# EAGLE board Side_Short (EAGLE 9.4.2)
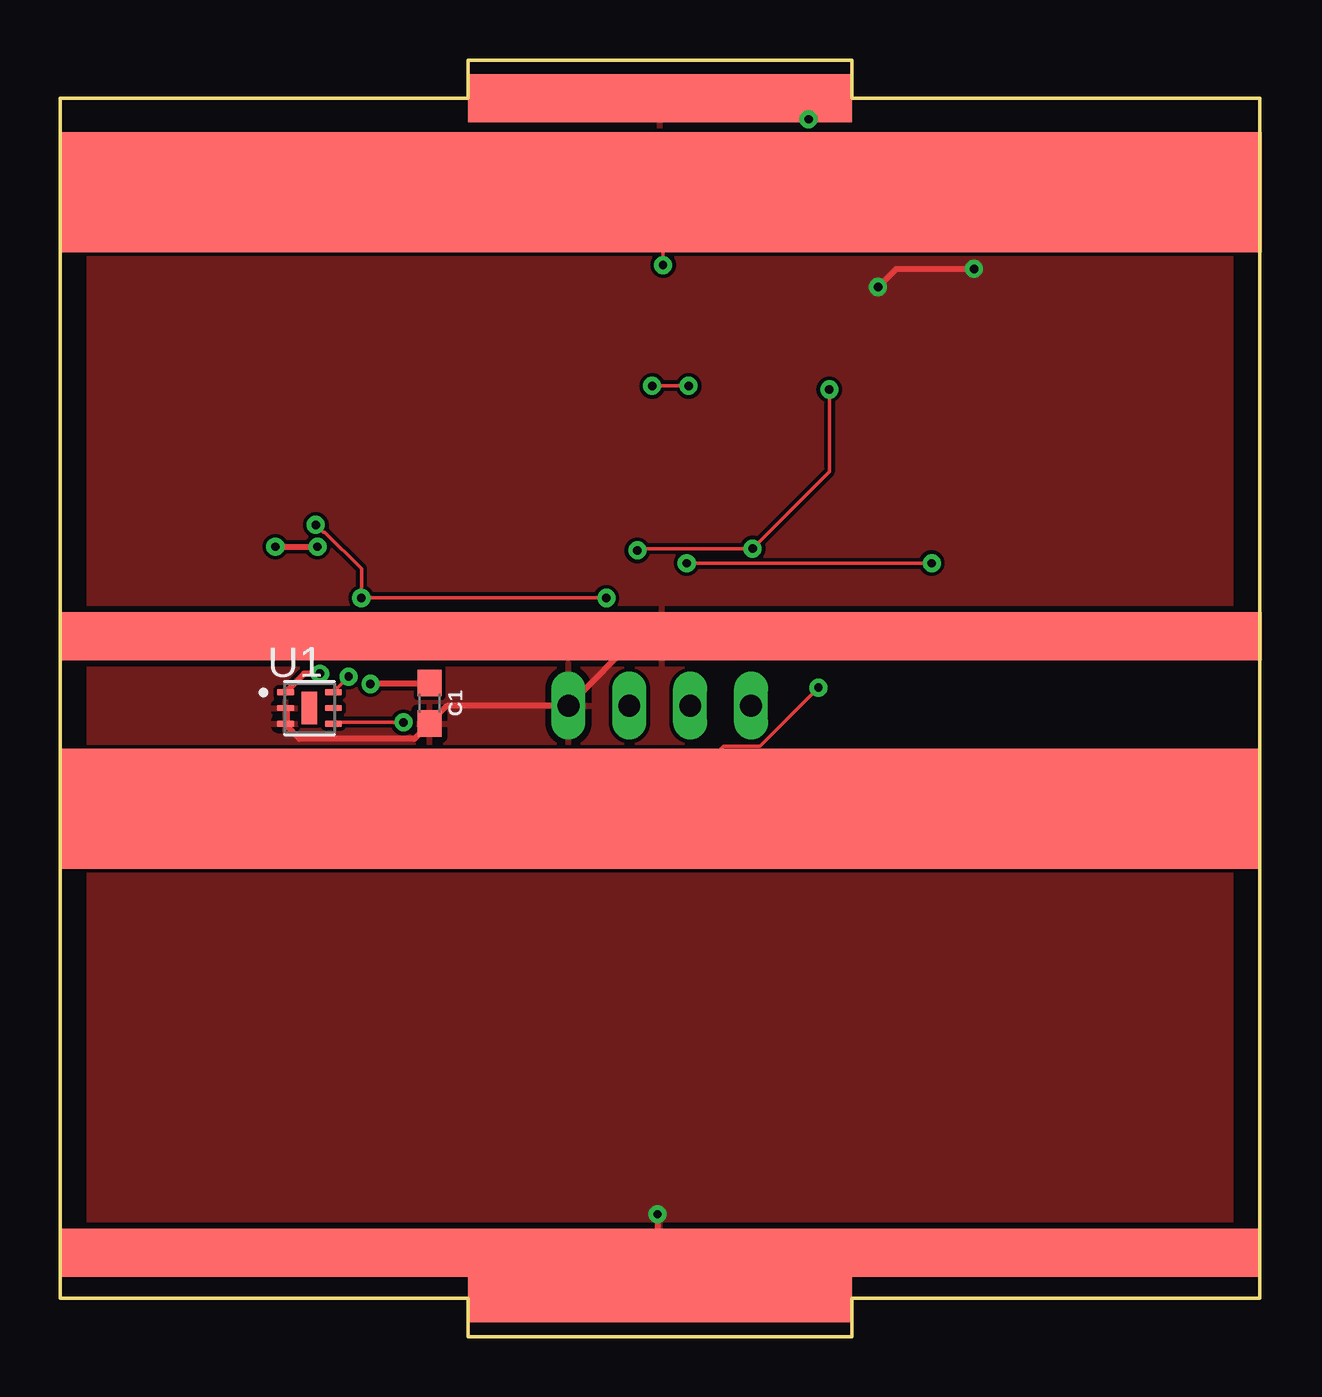
[diagram p0: board, top side]
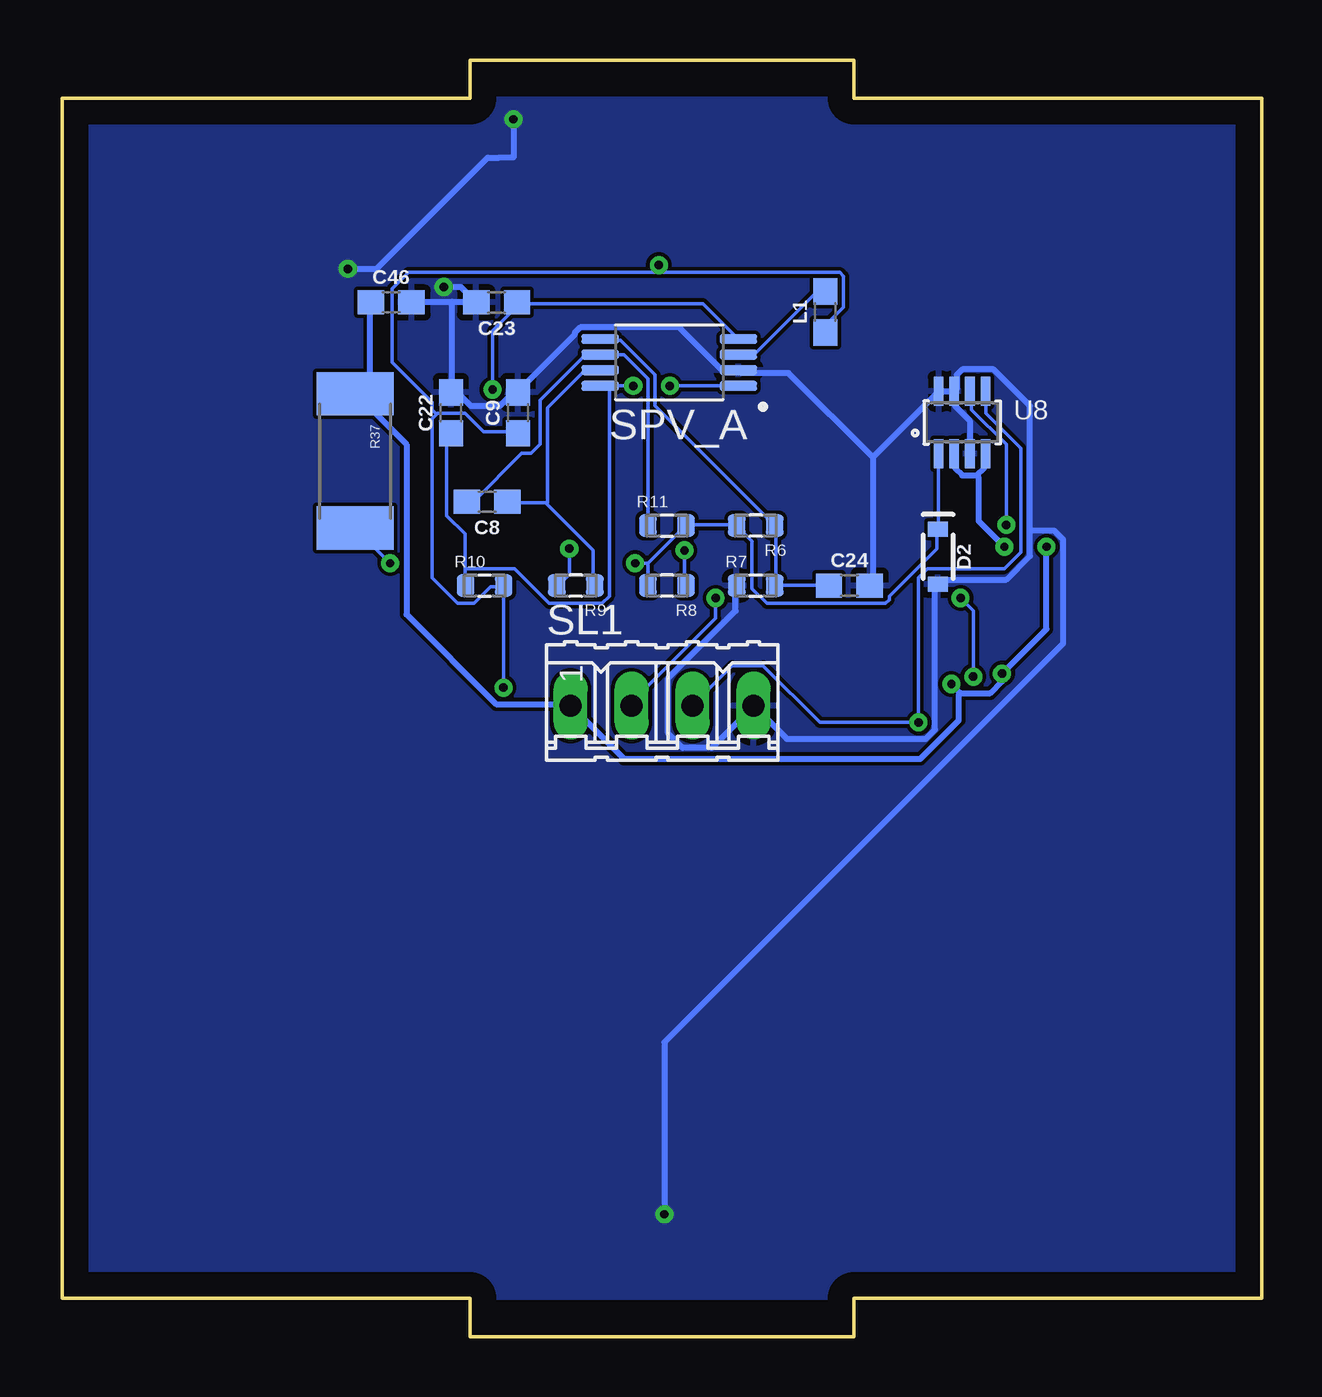
[diagram p1: board, bottom side, seen from below]

Size 50 x 53.2 mm. Coordinates in mm from the lower left corner, seen from the top.
Outline: 0,1.6 17,1.6 17,0 33,0 33,1.6 50,1.6 50,51.6 33,51.6 33,53.2 17,53.2 17,51.6 0,51.6 0,1.6
Copper layers (1*16): Top 0.035mm / dielectric 1.5mm / Bottom 0.035mm
Design rules "default *": minimum track width 6mil, minimum drill 0.35mm, track to track 6mil, track to pad 6mil, pad to pad 6mil, via to via 6mil, smd to smd 6mil, copper to edge 40mil, drill to drill 6mil, minimum pad ring 10mil, minimum via ring 8mil, stop-mask expansion 4mil, vias tented up to drill 0mil, thermal gap 10mil
Net classes: 1 vcc: width 0.254 mm

## Footprints (pad centres in the part's own frame; a part is rotated, then mirrored left to right if it is on the bottom)
0603 = smd 1.1 x 1: 1 -0.85,0; 2 0.85,0
SOD-323 = smd 0.63 x 0.83: A 1.15,0; C -1.15,0
RES_0603 = smd 0.74 x 0.93: 1 -0.795,0; 2 0.795,0
2512 = smd 1.8 x 3.2: 1 -2.8,0; 2 2.8,0
04P = drill 0.914 long: 1 -3.81,0; 2 -1.27,0; 3 1.27,0; 4 3.81,0
SOP65P640X120-8N = smd 1.56 x 0.41: 1 -2.88,0.975; 2 -2.88,0.325; 3 -2.88,-0.325; 4 -2.88,-0.975; 5 2.88,-0.975; 6 2.88,-0.325; 7 2.88,0.325; 8 2.88,0.975
SON65P200X200X65-7N = smd 0.72 x 0.27: 1 -0.995,0.65; 2 -0.995,0; 3 -0.995,-0.65; 4 0.995,-0.65; 5 0.995,0; 6 0.995,0.65 | smd 0.65 x 1.35: 7 0,0
SOT23-8 = smd 0.4 x 1.2: 1 -0.975,-1.3; 2 -0.325,-1.3; 3 0.325,-1.3; 4 0.975,-1.3; 5 0.975,1.3; 6 0.325,1.3; 7 -0.325,1.3; 8 -0.975,1.3
16X2 = smd 16 x 2: P$1 0,0
FOOT = smd 50 x 5: P$1 0,0 | smd 50 x 2: P$2 0,18.5

## Placement (x,y rotation side)
C1  2.2nF  [0603]  15.4,26.4 270 top
C8  1uF  [0603]  32.3,34.8 180 bottom
C9  10uF  [0603]  31,38.5 90 bottom
C22  1nF  [0603]  33.8,38.5 90 bottom
C23  10uF  [0603]  31.9,43.1 180 bottom
C24  1nF  [0603]  17.2,31.3 0 bottom
C46  0.1uF  [0603]  36.3,43.1 0 bottom
D2  5.6V  [SOD-323]  13.5,32.5 270 bottom
L1  10uH  [0603]  18.2,42.7 90 bottom
R6  1M  [RES_0603]  21.1,33.8 180 bottom
R7  510k  [RES_0603]  21.1,31.3 0 bottom
R8  10m  [RES_0603]  24.8,31.3 180 bottom
R9  1k  [RES_0603]  28.6,31.3 180 bottom
R10  1k  [RES_0603]  32.4,31.3 0 bottom
R11  1k  [RES_0603]  24.8,33.8 0 bottom
R37  0.1/1% (PT2512FK-070R1L)  [2512]  37.8,36.5 270 bottom
SL1  [04P]  25,26.3 0 bottom
SPV_A  SPV1040T_  [SOP65P640X120-8N]  24.7,40.6 180 bottom
U1  [SON65P200X200X65-7N]  10.4,26.2 0 top
U8  SOLAR_CURRENT_A  [SOT23-8]  12.5,38.1 0 bottom
U$1  16X2  [16X2]  25,51.6 0 top
U$2  16X2  [16X2]  25,1.6 0 top
U$3  SOLAR_50_5_2  [FOOT]  25.1,47.7 180 top
U$4  SOLAR_50_5_2  [FOOT]  25,22 180 top

## Library data of the parts
C1 = SparkFun-Capacitors; PROD_ID: CAP-07877
C8 C9 C22-C24 C46 = SparkFun-Capacitors; PROD_ID: CAP-11015
D2 = SparkFun-DiscreteSemi; PROD_ID: DIO-12442
L1 = SparkFun-Coils; PROD_ID: NDUC-07874
R6-R11 = Resistor_Capacitor; CREATED_BY: PCBLayout.com; DIGIKEY_PART_NUMBER: 311-0.0GRTR-ND; MANUFACTURER: Yageo; MPN: RC0603JR-070RL; PACKAGE: SMD 0603
R37 U8 = microbuilder
SL1 = con-amp-quick; OC_FARNELL: unknown; OC_NEWARK: unknown
SPV_A = SPV1040T
U1 = SON65P200X200X65-7N; A_MAX: 0.65; B_MAX: 0.3; B_MIN: 0.2; B_NOM: 0.25; D2_NOM: 1.35; D_MAX: 2.075; D_MIN: 1.925; D_NOM: 2.0; E2_NOM: 0.65; ENOM: 0.65; E_MAX: 2.075; E_MIN: 1.925; E_NOM: 2.0; L_MAX: 0.35; L_MIN: 0.25; L_NOM: 0.3; MANUFACTURER: Maxim Integrated; PIN_COUNT: 6.0; SNAPEDA_PACKAGE_ID: 71138; STANDARD: IPC 7351B
U$1 U$2 = 16x2PAD
U$3 U$4 = solar_50_5_2

## Nets
BAT+ [vcc]: C1.1 C46.1 R37.1 SL1.1 U1.1 U8.2 U8.4
GND [vcc]: C1.2 C9.2 C22.2 C23.2 C24.2 C46.2 D2.A R7.1 SL1.4 SPV_A.2 U1.2 U1.3 U8.3 U8.7 U8.8 U$1.P$1 U$2.P$1 U$3.P$2 U$4.P$2
N$5: L1.2 SPV_A.3
N$31: C22.1 R10.1 SPV_A.1 SPV_A.8
N$32: C24.1 R6.1 R7.2 SPV_A.5
N$34: C8.2 R11.1 SPV_A.6
N$35: C8.1 R9.1 SPV_A.7
N$36: C23.1 R8.1 R9.2 SPV_A.4
SCL_1: SL1.3 U1.4 U8.5
SDA_1: SL1.2 U1.6 U8.6
SPV_OUT: D2.C R6.2 R8.2 R11.2 R37.2 U8.1
SPVIN: C9.1 L1.1 R10.2 U$3.P$1 U$4.P$1

## Tracks (layer width: path | path; a pad name or v marks a point on that pad's centre or on a via)
BAT+  (via drill 0.35, 0.35 pad 0.6)
  Top 0.254: v10.84,27.63 10.17,27.63 9.44,26.9 U1.1 | v12.95,27.2 15.38,27.2 C1.1 | v8.98,32.92 v10.73,32.92
  Bottom 0.254: 11.88,35.89 11.57,36.2 11.57,36.73 U8.4 | 11.88,35.89 12.49,35.89 12.79,36.2 12.79,36.73 U8.2 | 12.56,26.82 11.32,26.82 10.84,27.31 v10.84,27.63 8.98,29.48 v8.98,32.92 | v12.95,27.2 12.56,26.82 | v10.73,32.92 11.8,33.98 11.8,35.81 11.88,35.89 | C46.1 37.18,43.05 37.18,39.93 37.79,39.32 R37.1 37.71,39.24 35.65,37.19 35.65,30.1 31.92,26.37 28.87,26.37 SL1.1 28.72,26.21 26.58,24.08 14.24,24.08 12.64,25.68 12.64,26.75 12.56,26.82
GND  (via drill 0.35)
  Top 0.254: U$2.P$1 25.06,1.6 25.06,3.43 U$4.P$2 24.91,3.58 v24.91,5.11 | U1.2 9.44,26.14 9.44,25.6 U1.3 9.44,25.45 9.97,24.92 14.77,24.92 15.38,25.53 C1.2 15.46,25.6 16.14,26.29 21.17,26.29 SL1.4 21.25,26.37 24.07,29.18 25.06,29.18 U$3.P$2 | v34.1,43.74 34.86,44.5 v38.1,44.5 | U$1.P$1 31.2,51.6 v31.2,50.73
  Bottom 0.254: 31,39.4 C9.2 | 33.75,39.4 C22.2 | 35.42,43.13 C46.2 | 12.87,39.4 U8.7 | 13.4,39.4 U8.8 | 13.55,39.47 U8.8 | 21.78,40.23 SPV_A.2 | 32.45,43.2 32.68,43.2 | SPV_A.2 21.94,40.31 22.55,40.31 24.3,42.06 28.41,42.06 28.64,41.83 28.64,41.76 30.93,39.47 C9.2 | 33.9,39.32 C22.2 | 35.58,43.13 C46.2 | 13.55,31.32 D2.A | 16.3,31.32 C24.2 | 13.48,31.47 D2.A | 16.6,31.24 16.45,31.24 C24.2 | 33.75,43.13 35.35,43.13 C46.2 | 33.75,43.13 32.83,43.13 C23.2 33.39,43.74 v34.1,43.74 | C9.2 31.08,39.32 31.23,39.32 31.77,38.79 32.98,38.79 33.67,39.47 C22.2 | 33.75,43.13 33.75,39.55 C22.2 | U8.3 12.18,38.18 12.79,38.79 12.79,39.32 U8.7 | 16.22,36.65 16.22,31.39 C24.2 | 16.22,36.65 13.55,39.32 U8.8 | 16.22,36.65 19.73,40.16 21.71,40.16 SPV_A.2 | U8.7 12.95,39.4 13.33,39.4 U8.8 | D2.A 13.63,31.24 13.63,25.3 14.01,24.92 19.8,24.92 21.17,26.29 SL1.4 21.25,26.21 22.93,24.54 24.15,24.54 24.76,25.15 24.76,27.43 21.94,30.25 21.94,31.24 R7.1 | 9.67,33.6 9.67,32.54 10.66,31.55 13.4,31.55 D2.A | 9.67,33.6 9.67,38.79 11.19,40.31 12.49,40.31 12.72,40.08 12.72,39.47 U8.7 | v24.91,5.11 24.91,12.27 8.3,28.88 8.3,33.22 8.68,33.6 9.67,33.6 | v38.1,44.5 36.9,44.5 32.27,49.13 31.8,49.13 31.2,49.13 v31.2,50.73
  pour Top: 0,1.6 0,51.6 50,51.6 50,1.6
  pour Bottom: 0,1.6 0,51.6 50,51.6 50,1.6
N$5
  Bottom 0.152: L1.2 18.2,43.51 18.58,43.51 21.1,41 21.78,41 SPV_A.3
N$31  (via drill 0.35)
  Top 0.152: v26.2,39.62 v24.68,39.62
  Bottom 0.152: 33.21,32 33.21,33.45 33.98,34.21 33.98,37.49 33.82,37.64 C22.1 | 33.21,32 33.21,31.32 R10.1 | v24.68,39.62 21.86,39.62 SPV_A.1 | 27.19,39.62 SPV_A.8 27.19,39.62 | 27.19,39.62 v26.2,39.62 | 33.21,32 31.16,32 29.71,30.56 27.5,30.56 27.19,30.86 27.19,39.62
N$32
  Bottom 0.152: C24.1 18.05,31.32 20.26,31.32 R7.2 20.26,31.39 20.26,33.76 R6.1 20.34,33.83 25.29,38.79 25.29,40.08 26.74,41.53 27.57,41.53 SPV_A.5
N$34
  Bottom 0.152: R11.1 25.59,33.83 25.59,39.93 26.58,40.92 SPV_A.6 27.65,40.92 28.18,40.92 30.09,39.01 30.09,37.19 30.47,36.8 30.85,36.8 32.83,34.82 33.14,34.82 C8.2
N$35
  Bottom 0.152: 29.82,34.71 29.86,34.75 31.38,34.75 C8.1 | 29.82,34.71 27.88,32.77 27.88,31.32 R9.1 | SPV_A.7 27.65,40.23 28.26,40.23 29.79,38.71 29.79,34.75 29.82,34.71
N$36  (via drill 0.35)
  Top 0.152: v24.07,32.77 24.15,32.84 v28.87,32.84 32.07,36.04 v32.07,39.47
  Bottom 0.152: v24.07,32.77 24.07,31.32 R8.1 | v28.87,32.84 28.87,31.78 29.33,31.32 R9.2 | SPV_A.4 21.86,41.61 23.31,43.05 31,43.05 C23.1 31,42.98 32.07,41.91 v32.07,39.47
SCL_1  (via drill 0.35)
  Top 0.152: v14.32,25.6 11.42,25.6 U1.4
  Bottom 0.152: SL1.3 23.69,26.37 22.09,27.96 20.79,27.96 18.43,25.6 v14.32,25.6 14.32,31.62 13.94,32 10.73,32 10.05,32.69 10.05,37.03 11.5,38.48 11.5,39.4 U8.5
SDA_1  (via drill 0.35)
  Top 0.152: v12.03,27.51 11.42,26.9 U1.6 | v22.77,30.79 v12.56,30.79 12.56,32 11.04,33.53 10.96,33.53 v10.66,33.83
  Bottom 0.152: v12.03,27.51 12.03,30.25 v12.56,30.79 | v22.77,30.79 22.77,29.95 26.2,26.52 26.2,26.37 SL1.2 | v10.66,33.83 10.66,37.19 12.11,38.63 12.11,39.4 U8.6
SPV_OUT  (via drill 0.35)
  Top 0.152: v26.13,32.23 v36.34,32.23
  Bottom 0.152: U8.1 13.48,36.73 13.48,33.68 D2.C 13.55,33.6 13.55,32.84 15.54,30.86 15.54,30.71 15.69,30.56 20.64,30.56 21.25,31.17 21.25,33.15 21.86,33.76 R6.2 21.94,33.83 23.99,33.83 R11.2 24.07,33.76 25.59,32.23 | 25.59,32.23 25.59,31.32 R8.2 | v36.34,32.23 37.79,33.68 R37.2 | 25.59,32.23 v26.13,32.23
SPVIN  (via drill 0.35)
  Top 0.152: v25.14,44.65 25.14,47.62 U$3.P$1 | v31.61,27.05 29.18,24.61 27.65,24.61 25.06,22.02 U$4.P$1
  Bottom 0.152: 34.4,38.44 34.36,38.48 33.21,38.48 32.45,37.72 31,37.72 C9.1 | 34.4,38.44 34.59,38.25 34.59,31.62 33.52,30.56 32.83,30.56 32.15,31.24 31.61,31.24 R10.2 31.61,31.17 v31.61,27.05 | 25.14,44.35 35.58,44.35 36.26,43.66 36.26,40.61 34.59,38.94 34.59,38.63 34.4,38.44 | 25.14,44.35 17.59,44.35 17.44,44.2 17.44,42.9 18.13,42.22 18.13,41.91 L1.1 | v25.14,44.65 25.14,44.35